# Altium PCB betaV2.1.PcbDoc (part 1 of 2)
Units mm, origin at the board's own origin, x right, y up, seen from the top; angles counter-clockwise.
Board outline 80.01 x 100.08 mm, 2 copper layers (Top Layer, Bottom Layer), stack 1.671 mm thick; 212 components, 112 nets, 564 pads, 132 vias.
Unrouted connection lines stored in the file: 45.
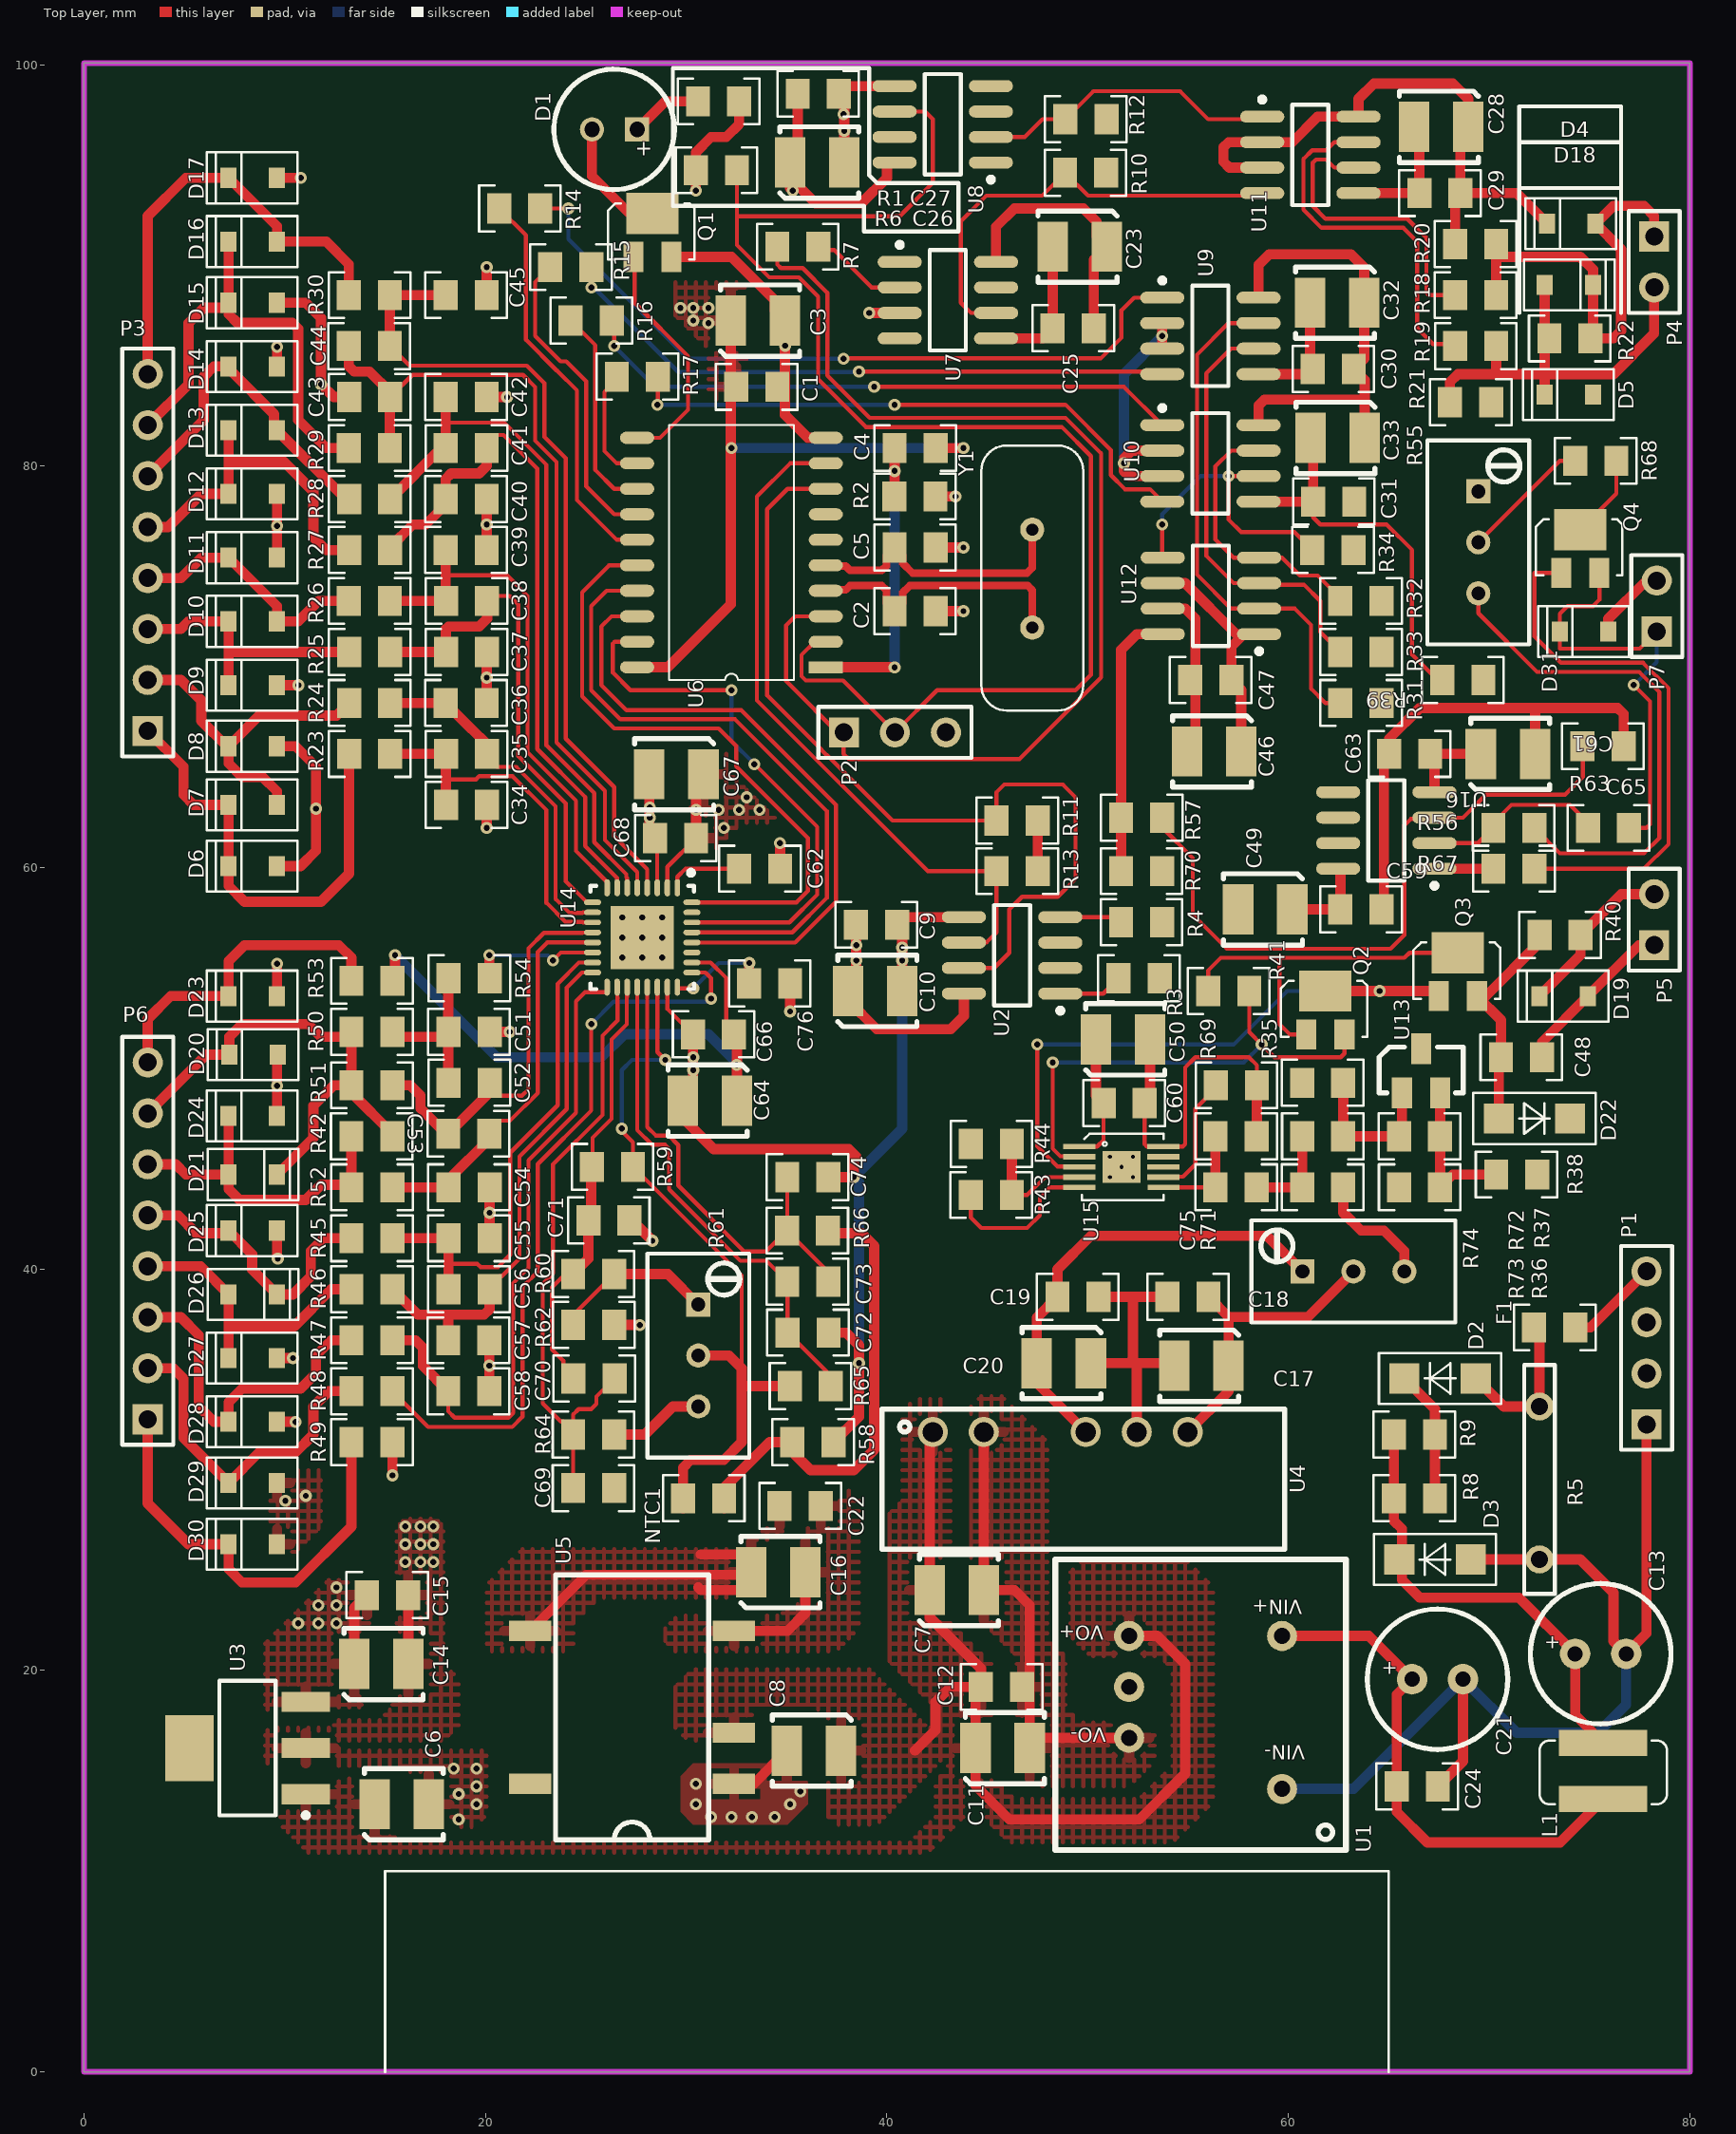
[diagram p0: Top Layer view]
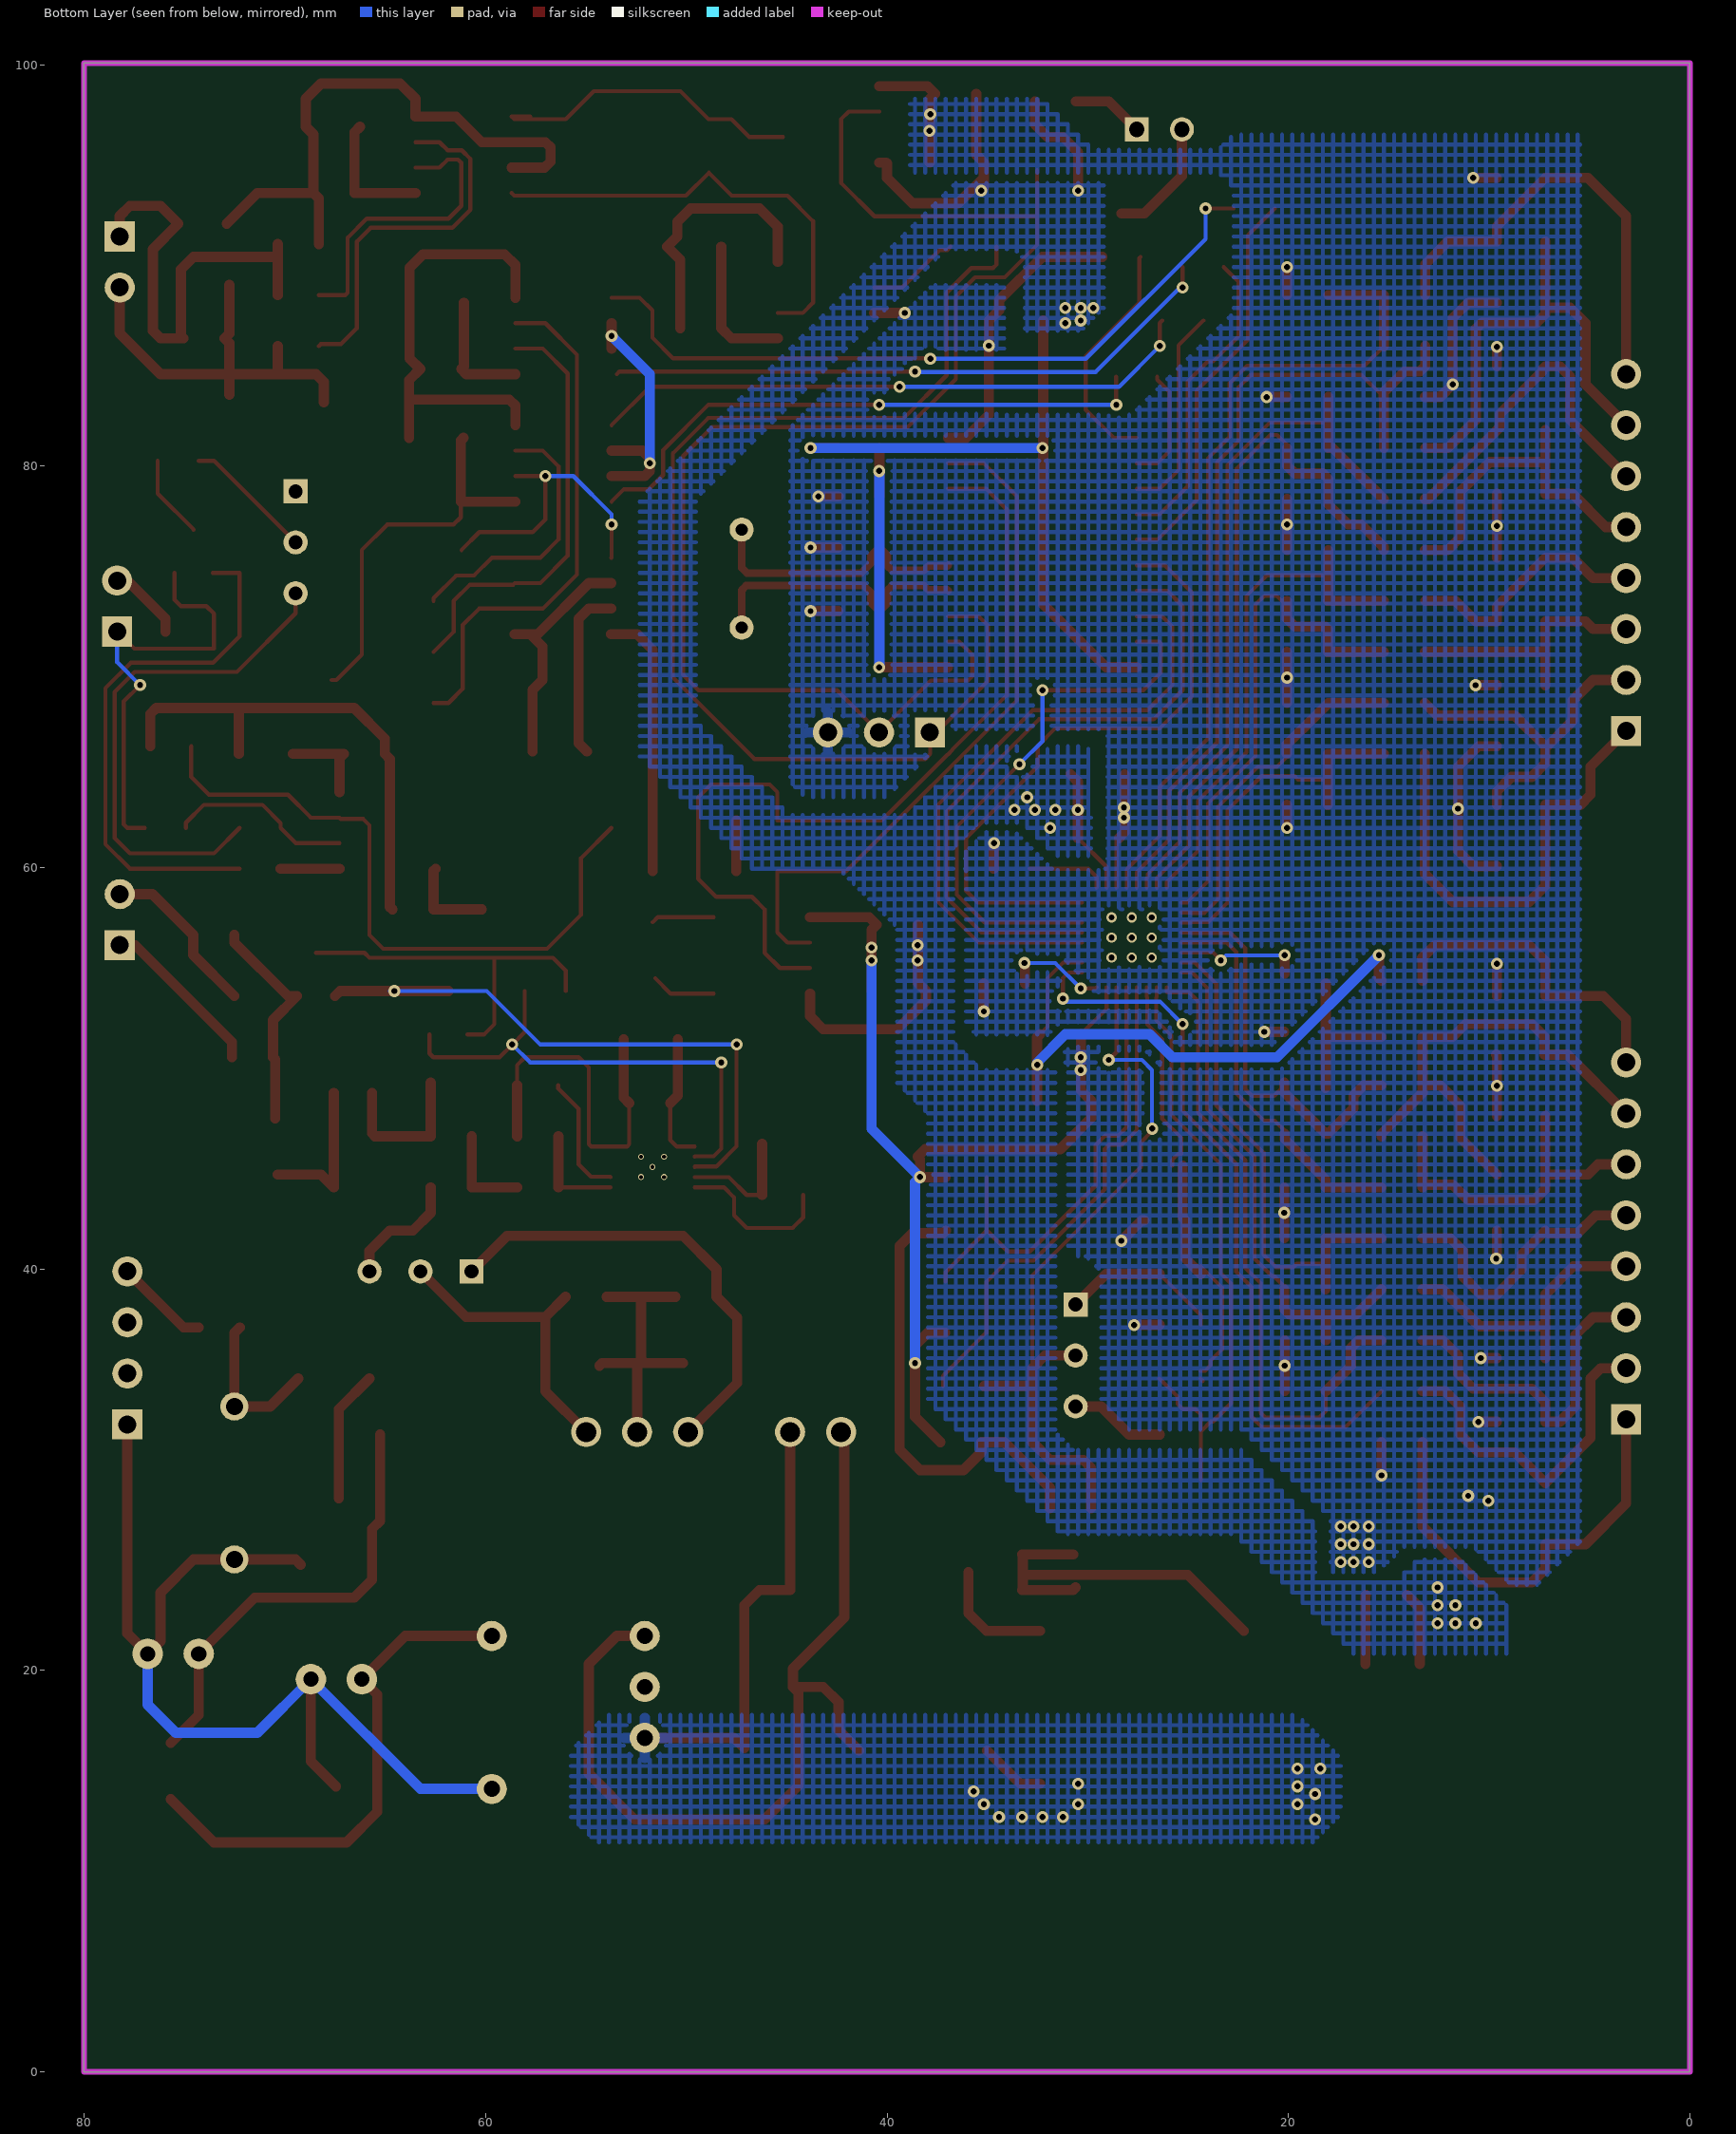
[diagram p1: Bottom Layer view, seen from below]

## Layer stack, top to bottom
Top Solder: solder mask 0.0102, Solder Resist, Dk 3.5
Top Layer: signal copper 0.0356
Dielectric 1: dielectric 1.6, FR-4, Dk 4.8
Bottom Layer: signal copper 0.0356
Bottom Solder: solder mask 0.0102, Solder Resist, Dk 3.5

## Board outline
0,0 0,100.076 80.01,100.076 80.01,0

## Design rules (kind name [scope] priority, off if disabled: settings)
Clearance [All] p1: gap=0.254 ignorepadtopadclearanceinfootprint=FALSE
DiffPairsRouting COM485_DiffPairsRouting [InDifferentialPair ('RS485')] p1: maxlimit=0.254 minlimit=0.254 mostfreqgap=0.254 toplayer_minwidth=0.203 toplayer_maxwidth=0.508 toplayer_prefwidth=0.203 bottomlayer_minwidth=0.203 bottomlayer_maxwidth=0.508 bottomlayer_prefwidth=0.203 maxuncoupledlength=12.7
DiffPairsRouting ADC_DiffPairsRouting [All] p2: maxlimit=0.254 minlimit=0.254 mostfreqgap=0.254 toplayer_minwidth=0.203 toplayer_maxwidth=0.508 toplayer_prefwidth=0.203 bottomlayer_minwidth=0.203 bottomlayer_maxwidth=0.508 bottomlayer_prefwidth=0.203 maxuncoupledlength=12.7
MatchedLengths COM485_MatchedLengths [InDifferentialPair ('RS485')] p1: tolerance=25.4 checknetsindiffpair=FALSE checkdiffpairvsdiffpair=TRUE checkxsignals=TRUE checkothers=TRUE
MatchedLengths ADC_MatchedLengths [InDifferentialPair('CHN2') And InDifferentialPair('CHN2') And InDifferentialPair('CHN3')And InDifferentialPair('CHN4')And InDifferentialPair('CHN5')And InDifferentialPair('CHN6')And InDifferentialPair('CHN7')And InDifferentialPair('REFIN1')] p2: tolerance=25.4 checknetsindiffpair=FALSE checkdiffpairvsdiffpair=TRUE checkxsignals=TRUE checkothers=TRUE
PolygonConnect PolygonConnectVia [IsVia] p1: connectstyle=Direct reliefconductorwidth=0.254 reliefentries=4 polygonreliefangle="90 Angle" airgapwidth=0.254
PolygonConnect [All] p2: connectstyle=Relief reliefconductorwidth=0.508 reliefentries=4 polygonreliefangle="90 Angle" airgapwidth=0.254
RoutingVias [All] p1: holewidth=0.3 width=0.6 viastyle="Through Hole" minholewidth=0.254 minwidth=0.508 maxholewidth=0.711 maxwidth=1.27
ShortCircuit [All] p1: allowed=TRUE
SolderMaskExpansion [All] p1: expansion=0.102 istentingtop=FALSE
Width [All] p1: maxlimit=1.016 minlimit=0.203 preferedwidth=0.203
28 further rules are at their usual default settings.

## Classes and differential pairs
differential pair XTAL: +XTAL_P -XTAL_N
differential pair RS485: +RS485_P -RS485_N
differential pair CHN5: +CHN5_P -CHN5_N
differential pair CHN7: +CHN7_P -CHN7_N
differential pair CHN6: +CHN6_P -CHN6_N
differential pair REFIN1: +REFIN1_P -REFIN1_N
differential pair CHN4: +CHN4_P -CHN4_N
differential pair CHN3: +CHN3_P -CHN3_N
differential pair CHN2: +CHN2_P -CHN2_N
differential pair CHN1: +CHN1_P -CHN1_N

## Components (designator, comment, footprint, x,y, rotation, side; value= is the part's Value field where it differs from the comment)
C1 "CC0805MRX7R9BB104" 0805C 32.496,83.947 r0 top value=0.1uF
C2 "CC0805MRX7R9BB330" 0805C 40.386,72.771 r0 top value=33pF
C3 "T494B106M006AHAUTO" CB 32.225,87.249 r90 top value=10uF
C4 "CC0805MRX7R9BB106" 0805C 42.434,80.899 r180 top value=10uF
C5 "CC0805MRX7R9BB330" 0805C 40.386,75.946 r0 top value=33pF
C6 "T494B106M006AHAUTO" CB 14.478,13.335 r90 top value=10uF
C7 "T494B106M006AHAUTO" CB 42.131,24.003 r90 top value=10uF
C8 "T494B106M006AHAUTO" CB 37.719,16.002 r270 top value=10uF
C9 "CC0805MRX7R9BB104" 0805C 38.465,57.15 r0 top value=0.1uF
C10 "T494B106M006AHAUTO" CB 38.067,53.848 r90 top value=10uF
C11 "T494B107M006AHAUTO" CB 44.417,16.129 r90 top value=100uF
C12 "CC0805MRX7R9BB104" 0805C 46.736,19.177 r180 top value=0.1uF
C13 "ECR1HQG100M-063007" Φ6.3×11.5 74.295,20.828 r0 top value=10uF
C14 "T494B476M010AHAUTO" CB 13.462,20.32 r90 top value=47uF
C15 "CC0805MRX7R9BB104" 0805C 14.097,23.749 r0 top value=0.1uF
C16 "T494B106M006AHAUTO" CB 33.241,24.892 r90 top value=10uF
C17 "T494B476K025ATAUTO" CB 57.023,35.179 r270 top value=47uF
C18 "CC0805MRX7R9BB104" 0805C 56.023,38.608 r180 top value=0.1uF
C19 "CC0805MRX7R9BB104" 0805C 48.498,38.608 r0 top value=0.1uF
C20 "T494B476K025ATAUTO" CB 50.165,35.306 r270 top value=47uF
C21 "ECR1HQG100M-063007" Φ6.3×11.5 66.167,19.558 r0 top value=10uF
C22 "CC0805MRX7R9BB104" 0805C 36.703,28.194 r180 top value=0.1uF
C23 "T494B106M006AHAUTO" CB 50.96,90.932 r270 top value=10uF
C24 "CC0805MRX7R9BB104" 0805C 65.405,14.224 r0 top value=0.1uF
C25 "CC0805MRX7R9BB104" 0805C 50.308,86.868 r180 top value=0.1uF
C26 "T494B106M006AHAUTO" CB 35.179,95.123 r90 top value=10uF
C27 "CC0805MRX7R9BB104" 0805C 35.56,98.552 r0 top value=0.1uF
C28 "T494B106M006AHAUTO" CB 68.961,96.901 r270 top value=10uF
C29 "CC0805MRX7R9BB104" 0805C 68.58,93.599 r180 top value=0.1uF
C30 "CC0805MRX7R9BB104" 0805C 63.262,84.836 r180 top value=0.1uF
C31 "CC0805MRX7R9BB104" 0805C 63.286,78.232 r180 top value=0.1uF
C32 "T494B106M006AHAUTO" CB 63.787,88.138 r270 top value=10uF
C33 "T494B106M006AHAUTO" CB 63.811,81.407 r270 top value=10uF
C34 "CC0805MRX7R9BB103" 0805C 18.034,63.119 r0 top value=0.01uF
C35 "CC0805MRX7R9BB104" 0805C 18.034,65.659 r0 top value=0.1uF
C36 "CC0805MRX7R9BB103" 0805C 18.018,68.199 r0 top value=0.01uF
C37 "CC0805MRX7R9BB103" 0805C 18.034,70.739 r0 top value=0.01uF
C38 "CC0805MRX7R9BB104" 0805C 20.082,73.279 r180 top value=0.1uF
C39 "CC0805MRX7R9BB103" 0805C 18.018,75.819 r0 top value=0.01uF
C40 "CC0805MRX7R9BB103" 0805C 18.018,78.359 r0 top value=0.01uF
C41 "CC0805MRX7R9BB104" 0805C 20.066,80.899 r180 top value=0.1uF
C42 "CC0805MRX7R9BB103" 0805C 18.018,83.439 r0 top value=0.01uF
C43 "CC0805MRX7R9BB103" 0805C 15.256,83.439 r180 top value=0.01uF
C44 "CC0805MRX7R9BB104" 0805C 13.192,85.979 r0 top value=0.1uF
C45 "CC0805MRX7R9BB103" 0805C 18.018,88.519 r0 top value=0.01uF
C46 "T494B106M006AHAUTO" CB 57.658,65.786 r270 top value=10uF
C47 "CC0805MRX7R9BB104" 0805C 55.118,69.342 r0 top value=0.1uF
C48 "CC0805MRX7R9BB103" 0805C 70.596,50.546 r0 top value=0.01uF
C49 "T494B106M025AHAUTO" CB 60.198,57.912 r270 top value=10uF
C50 "T494B106M025AHAUTO" CB 50.419,51.435 r90 top value=10uF
C51 "CC0805MRX7R9BB103" 0805C 18.161,51.816 r0 top value=0.01uF
C52 "CC0805MRX7R9BB104" 0805C 20.209,49.276 r180 top value=0.1uF
C53 "CC0805MRX7R9BB104" 0805C 18.145,46.736 r0 top value=0.1uF
C54 "CC0805MRX7R9BB103" 0805C 18.161,44.069 r0 top value=0.01uF
C55 "CC0805MRX7R9BB103" 0805C 18.161,41.529 r0 top value=0.01uF
C56 "CC0805MRX7R9BB104" 0805C 18.161,38.989 r0 top value=0.1uF
C57 "CC0805MRX7R9BB103" 0805C 18.145,36.449 r0 top value=0.01uF
C58 "CC0805MRX7R9BB103" 0805C 18.145,33.909 r0 top value=0.01uF
C59 "CC0805MRX7R9BB104" 0805C 64.643,57.912 r180 top value=0.1uF
C60 "CC0805MRX7R9BB104" 0805C 52.848,48.26 r180 top value=0.1uF
C61 "T494B106M025AHAUTO" CB 69.596,65.659 r90 top value=10uF
C62 "CC0805MRX7R9BB104" 0805C 34.687,59.944 r180 top value=0.1uF
C63 "CC0805MRX7R9BB104" 0805C 65.024,65.659 r0 top value=0.1uF
C64 "T494B106M006AHAUTO" CB 32.529,48.387 r270 top value=10uF
C65 "CC0805MRX7R9BB104" 0805C 74.66,66.04 r0 top value=0.1uF
C66 "CC0805MRX7R9BB104" 0805C 32.385,51.689 r180 top value=0.1uF
C67 "T494B106M006AHAUTO" CB 30.861,64.643 r270 top value=10uF
C68 "CC0805MRX7R9BB104" 0805C 30.496,61.468 r180 top value=0.1uF
C69 "CC0805MRX7R9BB103" 0805C 24.368,29.083 r0 top value=0.01uF
C70 "CC0805MRX7R9BB104" 0805C 26.432,34.544 r180 top value=0.1uF
C71 "CC0805MRX7R9BB103" 0805C 25.13,42.418 r0 top value=0.01uF
C72 "CC0805MRX7R9BB103" 0805C 35.052,36.83 r0 top value=0.01uF
C73 "CC0805MRX7R9BB104" 0805C 35.036,39.37 r0 top value=0.1uF
C74 "CC0805MRX7R9BB103" 0805C 35.036,44.577 r0 top value=0.01uF
C75 "CC0805MRX7R9BB104" 0805C 58.42,46.609 r180 top value=0.1uF
C76 "CC0805MRX7R9BB104" 0805C 35.179,54.229 r180 top value=0.1uF
D1 "150080GS75000" LEDΦ3.0 27.559,96.774 r180 top
D2 "1N5819HW" SOD123 69.342,34.544 r180 top
D3 "1N5819HW" SOD123 69.088,25.527 r180 top
D4 "SD12CT1" SOD323 75.311,92.075 r180 top
D5 "SD12CT1" SOD323 75.184,83.566 r180 top
D6 "SD03C" SOD323 9.614,60.071 r180 top
D7 "SD03C" SOD323 9.614,63.119 r180 top
D8 "SD03C" SOD323 9.614,66.04 r180 top
D9 "SD03C" SOD323 9.614,69.088 r180 top
D10 "SD03C" SOD323 9.614,72.263 r180 top
D11 "SD03C" SOD323 9.614,75.438 r180 top
D12 "SD03C" SOD323 9.614,78.613 r180 top
D13 "SD03C" SOD323 9.614,81.788 r180 top
D14 "SD03C" SOD323 9.614,84.963 r180 top
D15 "SD03C" SOD323 9.614,88.138 r180 top
D16 "SD03C" SOD323 9.614,91.186 r180 top
D17 "SD03C" SOD323 9.614,94.361 r180 top
D18 "SD12CT1" SOD323 72.771,89.027 r0 top
D19 "SD15CT1" SOD323 74.93,53.594 r180 top
D20 "SD03C" SOD323 9.652,50.673 r180 top
D21 "SD03C" SOD323 7.201,44.704 r0 top
D22 "RB160MM-50TF" SOD123 70.485,47.498 r0 top
D23 "SD03C" sod323 9.614,53.594 r180 top
D24 "SD03C" SOD323 9.614,47.625 r180 top
D25 "SD03C" SOD323 9.614,41.91 r180 top
D26 "SD03C" SOD323 7.201,38.735 r0 top
D27 "SD03C" SOD323 9.614,35.56 r180 top
D28 "SD03C" SOD323 9.614,32.385 r180 top
D29 "SD03C" sod323 9.614,29.337 r180 top
D30 "SD03C" sod323 9.614,26.289 r180 top
D31 "SD15CT1" SOD323 75.946,71.755 r180 top
F1 "Fuse 1" 0805R 74.295,37.084 r180 top
L1 "VLS4012HBX-150M" VLS4012 75.692,16.383 r0 top value=15uH
NTC1 "NTCS0805E3103JHT" 0805R 31.893,28.575 r180 top
P1 "Header 4" HDR1X4 77.851,32.258 r90 top
P2 "Header 3" HDR1X3 37.862,66.735 r0 top
P3 "Header 8" HDR1X8 3.175,66.802 r90 top
P4 "Header 2" HDR1X2 78.232,91.44 r270 top
P5 "Header 2" HDR1X2 78.232,56.134 r90 top
P6 "Header 8" HDR1X8 3.175,32.512 r90 top
P7 "Header 2" HDR1X2 78.359,71.755 r90 top
Q1 "MMSS8050" SOT-23-BJT 27.371,90.424 r0 top
Q2 "SS8550" SOT-23-BJT 60.899,51.689 r0 top
Q3 "SI2309" SOT-23-MOS 67.503,53.594 r0 top
Q4 "MMSS8050" SOT-23-BJT 73.599,74.676 r0 top
R1 "RC0805JR-07120RL" 0805R 32.639,98.171 r180 top value=120
R2 "RC0805JR-0710KL" 0805R 42.418,78.486 r180 top value=10K
R3 "RC0805JR-07470RL" 0805R 51.546,54.483 r0 top value=470
R4 "RC0805JR-073300RL" 0805R 51.673,57.277 r0 top value=3.3K
R5 "10D470K" mov 72.517,29.337 r90 top
R6 "RC0805JR-0710KRL" 0805R 32.528,94.742 r180 top value=10K
R7 "RC0805JR-07470RL" 0805R 34.544,90.932 r0 top value=470
R8 "PNP-200KJBJ26-10R" 0805R 65.262,28.575 r0 top value=10
R9 "PNP-200KJBJ26-10R" 0805R 65.262,31.75 r0 top value=10
R10 "RC0805JR-0710KRL" 0805R 48.879,94.615 r0 top value=10K
R11 "RC0805JR-071KL" 0805R 47.514,62.341 r180 top value=1K
R12 "RC0805JR-07470RL" 0805R 48.895,97.282 r0 top value=470
R13 "RC0805JR-071KL" 0805R 47.514,59.817 r180 top value=1K
R14 "RC0805JR-07470RL" 0805R 22.733,92.837 r180 top value=470
R15 "RC0805JR-07470RL" 0805R 25.273,89.916 r180 top value=470
R16 "RC0805JR-07470RL" 0805R 26.289,87.249 r180 top value=470
R17 "RC0805JR-07470RL" 0805R 28.591,84.455 r180 top value=470
R18 "RC0805JR-0720RL" 0805R 68.31,88.519 r0 top value=20
R19 "RC0805JR-0720RL" 0805R 70.358,85.979 r180 top value=20
R20 "RC0805JR-0710KL" 0805R 68.31,91.059 r0 top value=10K
R21 "RC0805JR-0710KL" 0805R 70.104,83.185 r180 top value=10K
R22 "RC0805JR-07120RL" 0805R 73.009,86.36 r0 top value=120
R23 "RC0805JR-071KL" 0805R 15.256,65.659 r180 top value=1K
R24 "RC0805JR-071KL" 0805R 15.256,68.199 r180 top value=1K
R25 "RC0805JR-071KL" 0805R 15.256,70.739 r180 top value=1K
R26 "RC0805JR-071KL" 0805R 15.24,73.279 r180 top value=1K
R27 "RC0805JR-071KL" 0805R 15.256,75.819 r180 top value=1K
R28 "RC0805JR-071KL" 0805R 15.256,78.359 r180 top value=1K
R29 "RC0805JR-071KL" 0805R 15.24,80.899 r180 top value=1K
R30 "RC0805JR-071KL" 0805R 15.24,88.519 r180 top value=1K
R31 "RC0805JR-071KL" 0805R 64.643,68.199 r180 top value=1K
R32 "RC0805JR-071KL" 0805R 64.643,73.279 r180 top value=1K
R33 "RC0805JR-071KL" 0805R 64.643,70.739 r180 top value=1K
R34 "RC0805JR-071KL" 0805R 63.246,75.819 r180 top value=1K
R35 "RC0805JR-073KL" 0805R 60.69,49.276 r0 top value=3K
R36 "RC0805JR-0710KL" 0805R 67.564,44.069 r180 top value=10K
R37 "RC0805JR-073KL" 0805R 65.516,46.609 r0 top value=3K
R38 "RC0805JR-0710KL" 0805R 70.358,44.704 r0 top value=10K
R39 "RC0805JR-000KL" 0805R 67.675,69.342 r0 top value=0R
R40 "RC0805JR-0715RL" 0805R 74.565,56.642 r180 top value=15
R41 "RC0805JR-0715RL" 0805R 56.007,53.848 r0 top value=15
R42 "RC0805JR-075600RL" 0805R 13.319,46.609 r0 top value=5.6K
R43 "RC0805JR-075600RL" 0805R 44.18,43.688 r0 top value=5.6K
R44 "RC0805JR-078200RL" 0805R 46.228,46.228 r180 top value=8.2K
R45 "RC0805JR-071KL" 0805R 15.367,41.529 r180 top value=1K
R46 "RC0805JR-071KL" 0805R 15.367,38.989 r180 top value=1K
R47 "RC0805JR-071KL" 0805R 15.367,36.449 r180 top value=1K
R48 "RC0805JR-07470RL" 0805R 15.367,33.909 r180 top value=470
R49 "RC0805JR-07470RL" 0805R 15.367,31.369 r180 top value=470
R50 "RC0805JR-071KL" 0805R 15.367,51.816 r180 top value=1K
R51 "RC0805JR-071KL" 0805R 15.367,49.149 r180 top value=1K
R52 "RC0805JR-071KL" 0805R 15.367,44.069 r180 top value=1K
R53 "RC0805JR-07470RL" 0805R 15.367,54.356 r180 top value=470
R54 "RC0805JR-07100RL" 0805R 20.209,54.483 r180 top value=100R
R55 "3296W-1-104" POTENTIOMETER-3296W 69.469,76.2 r270 top value=100K
R56 "RC0805JR-07100ML" 0805R 70.215,61.976 r0 top value=100M
R57 "RC0805JR-072KL" 0805R 53.721,62.484 r180 top value=2K
R58 "RC0805JR-075600RL" 0805R 37.338,31.369 r180 top value=5.6K
R59 "RC0805JR-071000KL" 0805R 27.35,45.087 r180 top value=1M
R60 "RC0805JR-0768KL" 0805R 24.368,39.751 r0 top value=68K
R61 "3296W-1-102" POTENTIOMETER-3296W 30.607,35.687 r270 top value=1K
R62 "RC0805JR-0768KL" 0805R 26.416,37.211 r180 top value=68K
R63 "RC0805JR-072KL" 0805R 76.978,61.976 r180 top value=2K
R64 "RC0805JR-071KL" 0805R 24.368,31.75 r0 top value=1K
R65 "RC0805JR-071KL" 0805R 37.211,34.163 r180 top value=1K
R66 "RC0805JR-071KL" 0805R 35.02,41.91 r0 top value=1K
R67 "RC0805JR-0710KL" 0805R 72.263,59.944 r180 top value=10K
R68 "RC0805JR-07470RL" 0805R 74.295,80.264 r0 top value=470
R69 "RC0805JR-072KL" 0805R 58.436,49.149 r180 top value=2K
R70 "RC0805JR-072KL" 0805R 51.673,59.817 r0 top value=2K
R71 "RC0805JR-073300RL" 0805R 58.42,44.069 r180 top value=3.3K
R72 "RC0805JR-074700RL" 0805R 62.738,46.609 r180 top value=4.7K
R73 "RC0805JR-07100ML" 0805R 60.69,44.069 r0 top value=100M
R74 "3296W-1-104" POTENTIOMETER-3296W 63.246,39.878 r0 top value=100K
U1 "WRB_ST(SD)-3WR2" WRB_ST(SD)-3WR2 59.69,14.097 r180 top
U2 "VO2630" so-8-n 48.654,53.721 r180 top
U3 "LM1117IMP-3.3/NOPB" SOT223_N 8.149,16.129 r180 top
U4 "A05_S-1WR3" A05_S-1WR3 42.291,31.877 r0 top
U5 "F0505XT-W2R3" F0505XT-W2R3 32.385,14.351 r90 top
U6 "STC12C5620AD" SOP20 36.957,69.977 r180 top
U7 "6N137" so-8-n 40.627,90.17 r0 top
U8 "6N137" so-8-n 45.199,95.123 r180 top
U9 "VO2630" so-8-n 53.708,88.392 r0 top
U10 "VO2630" so-8-n 53.708,82.042 r0 top
U11 "SN65LBC184" so-8-n 58.687,97.409 r0 top
U12 "DAC7611U" so-8-n 58.56,71.628 r180 top
U13 "TL431" SOT-23-3 65.664,48.768 r0 top
U14 "AD7124-8" TI-RHB32-3150X3150TP_V 27.813,56.515 r270 top
U15 "XTR111" S-PDSO-G10 49.589,46.101 r0 top
U16 "TL062ACD" so-8-n 67.297,59.944 r180 top
Y1 "XTAL" 11.0592MHZ 47.244,76.835 r270 top

## Footprints (in the part's own frame and the unit in brackets; to place one, negate y for a bottom-side part, rotate by r counter-clockwise, add the part's x,y. Pads: shape width x height; smd on the part's side, far side on the other; paste and mask are expansions set on the pad)
11.0592MHZ [mm]
  round 1.2 hole 0.6: 1(0,0) 2(4.88,0)
  silkscreen extent -4.19,-2.54 9.02,2.54, body extent -3.99,-2.29 8.81,2.54, height 4.3
0805C [mm]
  rect 1.2x1.5 smd: 1(0,0) 2(2.048,0)
  silkscreen extent -1.02,-1.14 3.05,1.14, body extent 0.02,-0.65 2.02,0.66, height 0.73
0805R [mm]
  rect 1.2x1.5 smd: 1(0,0) 2(2.048,0)
  silkscreen extent -1.02,-1.14 3.05,1.14, body extent -0.13,-0.67 2.17,0.68, height 0.76
A05_S-1WR3 [mm]
  round 1.5 hole 1: 1(0,0) 2(2.54,0) 4(7.62,0) 5(10.16,0) 6(12.7,0)
  silkscreen extent -2.54,-5.84 17.53,1.14, body extent -2.33,-5.29 17.32,0.71, height 10.16
CB [mm] "Tantalum?Capacitor"
  rect 2.5x1.524 smd: 1(0,0) 2(0,-2.7)
  silkscreen extent -1.78,-3.43 1.78,0.51, body extent -1.48,-3.37 1.52,0.33, height 4.11
F0505XT-W2R3 [mm]
  rect 1x2.1 smd: 1(0,0) 2(2.54,0) 4(7.62,0) 5(7.62,10.16) 8(0,10.16)
  silkscreen extent -2.79,1.27 10.41,8.89, body extent -2.79,-0.61 10.41,10.79, height 5
HDR1X2 [mm] "Connector; Header; 2 Position"
  rect 1.5x1.5 hole 0.9: 1(0,0)
  round 1.5 hole 0.9: 2(2.54,0)
  silkscreen extent -1.27,-1.27 3.81,1.27
HDR1X3 [mm] "Connector; Header; 3 Position"
  rect 1.5x1.5 hole 0.9: 1(0,0)
  round 1.5 hole 0.9: 2(2.54,0) 3(5.08,0)
  silkscreen extent -1.27,-1.27 6.35,1.27
HDR1X4 [mm] "Connector; Header; 4 Position"
  rect 1.5x1.5 hole 0.9: 1(0,0)
  round 1.5 hole 0.9: 2(2.54,0) 3(5.08,0) 4(7.62,0)
  silkscreen extent -1.27,-1.27 8.89,1.27
HDR1X8 [mm] "Connector; Header; 8 Position"
  rect 1.5x1.5 hole 0.9: 1(0,0)
  round 1.5 hole 0.9: 2(2.54,0) 3(5.08,0) 4(7.62,0) 5(10.16,0) 6(12.7,0) 7(15.24,0) 8(17.78,0)
  silkscreen extent -1.27,-1.27 19.05,1.27
LEDΦ3.0 [mm]
  rect 1.2x1.2 hole 0.762: 1(0,0)
  round 1.2 hole 0.762: 2(2.25,0)
  silkscreen extent -1.86,-3 4.14,3, body extent -0.64,-1.9 2.79,1.9, height 4.64
mov [mm] "Axial Device, Thru-Hole; 2 Leads; 0.3 in Pin Spacing"
  round 1.4 hole 0.85: 1(-3.81,0) 2(3.81,0)
  silkscreen extent -5.53,-0.76 5.88,0.76, body extent -5.5,-0.9 5.8,0.95, height 18.5
POTENTIOMETER-3296W [mm] "Thru-Hole; 3 Leads"
  rect 1.2x1.2 hole 0.7: 1(-2.54,0)
  round 1.2 hole 0.7: 2(0,0) 3(2.54,0)
  silkscreen extent -5.08,-2.54 5.08,2.54, body extent -4.78,-2.41 4.78,2.41, height 11.8
S-PDSO-G10 [mm]
  rect 1.6x0.27 smd: 1(0,0) 2(0,-0.508) 3(0,-1.016) 4(0,-1.524) 5(0,-2.032) 6(4.2,-2.032) 7(4.191,-1.524) 8(4.191,-1.016) 9(4.191,-0.508) 10(4.191,0)
  rect 1.88x1.57 smd: 12(2.1,-1.016)
  silkscreen extent 0.13,-2.67 4.19,0.64, body extent -0.42,-2.56 4.62,0.54, height 1.1
so-8-n [mm]
  oval 2.2x0.6 smd: 1(0.013,0) 2(0.013,-1.27) 3(0.013,-2.54) 4(0.013,-3.81) 5(4.813,-3.81) 6(4.813,-2.54) 7(4.813,-1.27) 8(4.813,0)
  silkscreen extent -0.11,-4.41 3.31,0.97, body extent -0.48,-4.39 5.3,0.51, height 1.45
SOD123 [mm]
  rect 1.5x1.5 smd: 1(0,0) 2(3.556,0)
  silkscreen extent -1.27,-1.27 4.83,1.27, body extent -0.2,-0.8 3.5,0.8, height 1.27
SOD323 [mm]
  rect 0.8x1 smd: 1(0,0) 2(2.413,0)
  silkscreen extent -1.03,-1.27 3.49,1.27, body extent -0.16,-0.68 2.44,0.67, height 1.1
sod323 [mm]
  rect 0.8x1 smd: 1(0,0) 2(2.413,0)
  silkscreen extent -1.03,-1.27 3.49,1.27, body extent -0.16,-0.68 2.44,0.67, height 1.1
SOP20 [mm]
  rect 1.7x0.6 smd: 1(0,0)
  oval 1.7x0.6 smd: 2(0,-1.27) 3(0,-2.54) 4(0,-3.81) 5(0,-5.08) 6(0,-6.35) 7(0,-7.62) 8(0,-8.89) 9(0,-10.16) 10(0,-11.43) 11(9.4,-11.43) 12(9.4,-10.16) 13(9.4,-8.89) 14(9.4,-7.62) 15(9.4,-6.35) 16(9.4,-5.08) 17(9.4,-3.81) 18(9.4,-2.54) 19(9.4,-1.27) 20(9.4,0)
  silkscreen extent 1.58,-12.06 7.82,0.64, body extent -0.45,-12.07 9.85,0.63, height 2.51
SOT223_N [mm] "SOT223, 4-Leads, Body 6.5x3.5mm, Pitch 2.3mm, Lead Span 7mm, IPC Medium Density"
  rect 2.4x1 smd: 1(-2.9,2.3) 2(-2.9,0) 3(-2.9,-2.3)
  rect 2.4x3.3 smd: 4(2.9,0)
  silkscreen extent -3.03,-3.35 1.4,3.47, body extent -1.85,-3.35 1.85,3.35, height 1.7
SOT-23-3 [mm]
  rect 1x1.524 smd: 1(0,0) 2(1.9,0) 3(0.95,2.2)
  silkscreen extent -1.14,0 3.05,2.29, body extent -0.55,-0.23 2.45,2.27, height 0.55
SOT-23-BJT [mm]
  rect 2.6x2.05 smd: 1(0.95,2.159)
  rect 1x1.5 smd: 2(0,0) 3(1.9,0)
  silkscreen extent -1.27,-0.13 3.05,2.67, body extent -0.55,-0.23 2.45,2.27, height 0.55
SOT-23-MOS [mm]
  rect 1x1.5 smd: 1(0,0) 3(1.9,0)
  rect 2.6x2.05 smd: 2(0.95,2.159)
  silkscreen extent -1.27,-0.13 3.05,2.67, body extent -0.55,-0.11 2.45,2.39, height 0.55
TI-RHB32-3150X3150TP_V [mm] "QFN, 32-Leads, Body 5x5mm, Pitch 0.5mm, Thermal Pad 3.15x3.15mm"
  oval 0.85x0.28 smd: 1(-2.475,1.75) 2(-2.475,1.25) 3(-2.475,0.75) 4(-2.475,0.25) 5(-2.475,-0.25) 6(-2.475,-0.75) 7(-2.475,-1.25) 8(-2.475,-1.75) 17(2.475,-1.75) 18(2.475,-1.25) 19(2.475,-0.75) 20(2.475,-0.25) 21(2.475,0.25) 22(2.475,0.75) 23(2.475,1.25) 24(2.475,1.75)
  oval 0.28x0.85 smd: 9(-1.75,-2.475) 10(-1.25,-2.475) 11(-0.75,-2.475) 12(-0.25,-2.475) 13(0.25,-2.475) 14(0.75,-2.475) 15(1.25,-2.475) 16(1.75,-2.475) 25(1.75,2.475) 26(1.25,2.475) 27(0.75,2.475) 28(0.25,2.475) 29(-0.25,2.475) 30(-0.75,2.475) 31(-1.25,2.475) 32(-1.75,2.475)
  rect 3.15x3.15 smd: 33(0,0)
  silkscreen extent -3.35,-2.58 2.58,2.57, body extent -2.54,-2.5 2.46,2.5, height 0.85
VLS4012 [mm]
  rect 4.4x1.3 smd: 1(0,0) 2(0,-2.8)
  silkscreen extent -3.17,-3.05 3.17,0.13, body extent -2.03,-3.62 2.03,0.83, height 1.7
WRB_ST(SD)-3WR2 [mm] "WRB_ST(SD)-3WR2"
  round 1.5 hole 0.8: 1(0,0) 4(0,-7.62) 5(7.62,-7.62) 6(7.62,-5.08) 7(7.62,-2.54)
  silkscreen extent -3.18,-11.43 11.3,3.05, body extent -2.94,-11.19 11.06,2.81, height 9
Φ6.3×11.5 [mil]
  round 60 hole 30: 1(0,0) 2(100,0)
  silkscreen extent -88,-138 188,138, body extent -75,-125 175,125, height 454

## Part data
C1 C2 C4 C5 C9 C12 C15 C18 C19 C22 C24 C25 C27 C29 C30 C31 C34 C35 C36 C37 C38 C39 C40 C41 C42 C43 C44 C45 C47 C48 C51 C52 C53 C54 C55 C56 C57 C58 C59 C60 C62 C63 C65 C66 C68 C69 C70 C71 C72 C73 C74 C75 C76: library part Cap, "Capacitor"
  C2 C5 C9 C12 C15 C18 C19 C22 C24 C25 C27 C29 C30 C31 C34 C35 C36 C37 C38 C39 C40 C41 C42 C43 C44 C45 C47 C48 C51 C52 C53 C54 C55 C56 C57 C58 C59 C60 C62 C63 C65 C66 C68 C69 C70 C71 C72 C73 C74 C75 C76: LatestRevisionDate=17-Jul-2002, LatestRevisionNote="Re-released for DXP Platform.", PackageDescription="Radial Cap, Thru-Hole; 2 Leads; 0.3 in Pin Spacing", PackageReference=RAD-0.3, Published=8-Jun-2000, Publisher="Altium Limited"
C3 C6 C7 C8 C10 C11 C13 C14 C16 C17 C20 C21 C23 C26 C28 C32 C33 C46 C49 C50 C61 C64 C67: library part "Cap Pol1", "Polarized Capacitor (Radial)", LatestRevisionDate=17-Jul-2002, LatestRevisionNote="Re-released for DXP Platform.", PackageDescription="Polarized Capacitor (Radial); 2 Leads", PackageReference=RB7.6-15, Published=8-Jun-2000, Publisher="Altium Limited"
D1: library part LED2, "Typical RED, GREEN, YELLOW, AMBER GaAs LED", LatestRevisionDate=17-Jul-2002, LatestRevisionNote="Re-released for DXP Platform.", PackageDescription="SM LED; 2 Flat Leads", PackageReference=3.2X1.6X1.1, PackageVersion=Feb-2002, Published=8-Jun-2000, Publisher="Altium Limited"
D2 D3: library part Diode, "Default Diode", Code_JEDEC=DO-214-AB, LatestRevisionDate=17-Jul-2002, LatestRevisionNote="Re-released for DXP Platform.", PackageDescription="DO-214-AB/SMC; 2 C-Bend Leads; Body 7.9 x 5.9 mm, inc. leads (LxW)", PackageReference=SMC, PackageVersion=Sep-1996, Published=8-Jun-2000, Publisher="Altium Limited"
D4 D5 D18 D19 D31: library part "D Zener", "Zener Diode", LatestRevisionDate=17-Jul-2002, LatestRevisionNote="Re-released for DXP Platform.", PackageDescription="Diode, Thru-Hole; 2 Leads; 0.7 in Pin Spacing", PackageReference=DIODE-0.7, Published=8-Jun-2000, Publisher="Altium Limited"
D6 D7 D8 D9 D10 D11 D12 D13 D14 D15 D16 D17 D20 D21 D23 D24 D25 D26 D27 D28 D29 D30: library part "TVS DIODE"
D22: library part "D Schottky", "Schottky Diode", Code_JEDEC=DO-214-AA, LatestRevisionDate=17-Jul-2002, LatestRevisionNote="Re-released for DXP Platform.", PackageDescription="DO-214-AA/SMB; 2 C-Bend Leads; Body 5.3 x 3.6 mm, inc. leads (LxW)", PackageReference=SMB, Published=8-Jun-2000, Publisher="Altium Limited"
F1: "Fuse", LatestRevisionDate=17-Jul-2002, LatestRevisionNote="Re-released for DXP Platform.", PackageDescription="Thru-Hole; 2 Leads", PackageReference=PIN-W2/E2.8, Published=8-Jun-2000, Publisher="Altium Limited"
L1: library part Inductor
NTC1 R5: library part "Res Varistor", "Varistor (Voltage-Sensitive Resistor)", Code_IPC=RESC2012, LatestRevisionDate=29-May-2009, LatestRevisionNote="IPC-7351 Footprint Added.", PackageDescription="Chip Resistor 0805 Case Size", PackageReference=6-0805, PackageVersion=Mar-2003, Published=24-Mar-1999, Publisher="Altium Limited"
P1: "Header, 4-Pin", LatestRevisionDate=17-Jul-2002, LatestRevisionNote="Re-released for DXP Platform.", Publisher="Altium Limited"
P2: "Header, 3-Pin", LatestRevisionDate=17-Jul-2002, LatestRevisionNote="Re-released for DXP Platform.", Publisher="Altium Limited"
P3 P6: "Header, 8-Pin", LatestRevisionDate=17-Jul-2002, LatestRevisionNote="Re-released for DXP Platform.", Publisher="Altium Limited"
P4 P5 P7: "Header, 2-Pin", LatestRevisionDate=17-Jul-2002, LatestRevisionNote="Re-released for DXP Platform.", Publisher="Altium Limited"
Q1 Q4: library part NPN, "NPN Bipolar Transistor", Code_JEDEC=TO-226-AA, LatestRevisionDate=17-Jul-2002, LatestRevisionNote="Re-released for DXP Platform.", PackageDescription="TO, Flat Index; 3 In-Line, Axial Leads; Body Dia. 4.8mm; Leads 0.55 x 0.51 mm (max)", PackageReference=TO-226-AA, Published=8-Jun-2000, Publisher="Altium Limited"
Q2: library part PNP, "PNP Bipolar Transistor", LatestRevisionDate=29-May-2009, LatestRevisionNote="IPC-7351 Footprint Added.", PackageDescription="3-Pin SOT-23 Package 0.95 mm Pitch, 2.4 mm Lead Span", PackageReference=SOT-23B, PackageVersion=Aug-1999, Published=8-Jun-2000, Publisher="Altium Limited"
Q3: library part NMOS-2, "N-Channel Power MOSFET", ComponentLink1Description="Manufacturer Link", ComponentLink1URL=http://www.irf.com/, DatasheetVersion=PD-9.814, LatestRevisionDate=17-Jul-2002, LatestRevisionNote="Re-released for DXP Platform.", Note="Pin 2 is electrically connected to pin 4.", PackageDescription="TO, Thru-Hole, Vertical, Heatsink Mounted; 3 In-Line Leads; Pitch 2.54 mm", PackageReference=TO-220AB, PackageVersion=Feb-1997, Published=8-Jun-2000, Publisher="Altium Limited"
R1 R2 R3 R4 R6 R7 R8 R9 R10 R11 R12 R13 R14 R15 R16 R17 R18 R19 R20 R21 R22 R23 R24 R25 R26 R27 R28 R29 R30 R31 R32 R33 R34 R35 R36 R37 R38 R39 R40 R41 R42 R43 R44 R45 R46 R47 R48 R49 R50 R51 R52 R53 R54 R56 R57 R58 R59 R60 R62 R63 R64 R65 R66 R67 R68 R69 R70 R71 R72 R73: library part Res2, "Resistor", LatestRevisionDate=17-Jul-2002, LatestRevisionNote="Re-released for DXP Platform.", PackageDescription="Axial Device, Thru-Hole; 2 Leads; 0.4 in Pin Spacing", PackageReference=AXIAL-0.4, Published=8-Jun-2000, Publisher="Altium Limited"
R55 R61 R74: library part RPot, "Potentiometer", LatestRevisionDate=17-Jul-2002, LatestRevisionNote="Re-released for DXP Platform.", PackageDescription="Variable Resistor, Thru-Hole; 3 Leads", PackageReference=VR5, Published=8-Jun-2000, Publisher="Altium Limited", Set Position=0.5, Sim Note="Enter the Resistance value and the set point into parameter fields."
U3: library part LM1117IMP
U11: library part SNx5LBC184
U12: library part DAC7611
U16: "Low-Power JFET-Input Operational Amplifier, 7 to 36 V, 0 to 70 degC, 8-pin SOIC (D8), Green (RoHS & no Sb/Br)", Manufacturer="Texas Instruments", Rating=Catalog, Supplier Part Number 1=296-7175-5-ND, Total Supply Voltage(Max)(+5V is 5, +/-5V is 10)=36, Total Supply Voltage(Min)(+5V is 5, +/-5V is 10)=7, CMRR(Min)(dB)=80, Code_JEDEC=MS-012, ComponentLink1Description="Manufacturer URL", ComponentLink1URL=http://www.ti.com/, ComponentLink2Description=Datasheet, ComponentLink2URL=http://www.ti.com/lit/ds/symlink/tl062a.pdf, ComponentLink3Description="Package Specification", ComponentLink3URL=http://www.ti.com/litv/pdf/msoi002j, DatasheetVersion=SLOS078J, Eco-Plan="Green (RoHS & no Sb/Br)", GBW(Typ)(MHz)=1, IIB(Max)(pA)=200, Iq per channel(Max)(mA)=0.25, Mounting Technology="Surface Mount", Number of Channels=2, Offset Drift(Typ)(uV/C)=10, PackageDescription="8-Pin Plastic Small Outline, Body 4.9 x 3.9 mm, Pitch 1.27 mm", PackageReference=D8, PackageVersion="4040047-3/M, 06/2011", PartNumber=TL062ACD, Slew Rate(Typ)(V/us)=3.5, Sub Family="General Purpose Amplifier, High Supply Voltage Amplifier (>=30V), Low Power Amp (<=500uA)", Supplier 1=Digi-Key, Supplier 2=Farnell, Supplier 3=Newark, Supplier 4=Mouser, Supplier Part Number 2=9593241, Supplier Part Number 3=08F9224, Supplier Part Number 4=595-TL062ACD, Vio (25C)(Max)(mV)=6, Vn at 1kHz(Typ)(nV/rtHz)=42
Y1: "Crystal Oscillator", LatestRevisionDate=17-Jul-2002, LatestRevisionNote="Re-released for DXP Platform.", PackageDescription="Crystal, Thru-Hole; 2 Leads; Body 3.1 x 8.2 mm (Dia.xH)", PackageReference=R38, Published=8-Jun-2000, Publisher="Altium Limited"

## Via types
v1: diameter 0.6, hole 0.3, Top Layer to Bottom Layer, 118 vias
v2: diameter 0.5, hole 0.3, Top Layer to Bottom Layer, 9 vias
v3: diameter 0.3, hole 0.2, Top Layer to Bottom Layer, 5 vias

## Nets (pads, with @x,y where several pads share a name; then routed paths per layer and width w, separated by ;. In a path a pad name is that pad's centre, name@x,y a point inside that pad or via, vN(x,y) a via of type N, cw(c..) or ccw(c..) an arc to the next point about the centre after c; other vN are vias at no path point)
3.3VCC: C1.1 C3.1 C4.1 C9.1 C10.1 C14.1 C15.1 C26.1 C27.1 C64.1 C66.1 C67.1 C68.1 R1.1 R6.2 R11.1 R13.1 R53.1 U2.8 U3.3 U6.20 U8.8 U14.2 U14.26 | length 105.1
  Top Layer w0.203: U14.2@29.063,58.99 29.063,60.035 C68.1@30.496,61.468 ; U14.26@30.288,55.265 31.222,55.265 32.004,54.483 32.004,52.07 C66.1@32.385,51.689
  Top Layer w0.508: C14.1@13.462,20.32 13.462,23.114 C15.1@14.097,23.749 ; R53.1@15.367,54.356 15.494,54.483 v1(15.494,55.626) ; U6.20@27.557,69.977 29.083,69.977 32.225,73.119 C3.1@32.225,87.249 ; v1(30.48,93.726) R6.2@30.48,94.742 30.48,95.631 31.242,96.393 32.004,96.393 32.639,97.028 R1.1@32.639,98.171 ; C68.1@30.496,61.468 30.496,64.278 C67.1@30.861,64.643 ; C66.1@32.385,51.689 32.529,51.545 C64.1@32.529,48.387 ; v1(35.306,93.726) 35.179,93.853 C26.1@35.179,94.361 ; C27.1@35.56,98.552 35.56,95.504 C26.1@35.179,95.123 C26.1@35.179,94.361 ; C9.1@38.465,57.15 38.465,54.246 C10.1@38.067,53.848 38.067,53.373 39.497,51.943 43.18,51.943 43.841,52.604 U2.8@43.841,53.721 ; U8.8@40.386,95.123 40.045,95.123 40.003,95.081 40.003,94.359 38.735,93.091 36.449,93.091 C26.1@35.179,94.361 ; C4.1@42.434,80.899 v1(43.815,80.899) ; R13.1@47.514,59.817 R11.1@47.514,62.341
  Bottom Layer w0.508: v1(15.494,55.626) 20.574,50.546 25.781,50.546 26.924,51.689 31.115,51.689 32.512,50.292 v1(32.512,50.165) ; v1(32.258,80.899) v1(43.815,80.899)
  other v1: 10.668,22.352 11.684,22.352 12.573,22.352 11.684,23.241 12.573,23.241 12.573,24.13 38.481,55.372 38.481,56.134 31.877,61.976 30.496,62.873 31.623,62.865 32.639,62.865 33.655,62.865 33.02,63.5 31.115,87.122 30.353,87.249 29.718,87.884 30.353,87.884 31.115,87.884
5VDD: C16.1 C22.2 C23.1 C25.1 C28.1 C29.1 C30.1 C31.1 C32.1 C33.1 D4.2 R3.2 R10.2 R12.2 R20.1 R31.1 R32.1 R33.1 R34.1 U5.5 U7.8 U9.8 U10.8 U11.2 U11.3 U11.8 | length 84.8
  Top Layer w0.508: U5.5@22.225,21.971 25.019,24.765 33.114,24.765 C16.1@33.241,24.892 ; 30.607,24.13 30.734,24.003 33.274,24.003 33.241,24.036 C16.1@33.241,24.892 ; 30.734,25.781 33.274,25.781 33.241,25.748 C16.1@33.241,24.892 ; U7.8@45.44,90.17 45.44,91.922 46.355,92.837 49.784,92.837 50.452,92.169 50.452,91.44 C23.1@50.96,90.932 50.308,90.28 C25.1@50.308,86.868 ; U10.8@58.521,82.042 58.521,83.014 58.819,83.312 63.811,83.312 ; U9.8@58.521,88.392 58.521,90.017 59.055,90.551 63.119,90.551 63.787,89.883 C32.1@63.787,88.138 63.787,85.361 C30.1@63.262,84.836 63.811,84.287 63.811,83.312 ; U11.3@58.7,94.869 57.067,94.869 56.769,95.167 56.769,95.885 57.023,96.139 U11.2@58.7,96.139 60.198,96.139 61.468,97.409 U11.8@63.5,97.409 63.5,98.298 64.262,99.06 68.199,99.06 68.961,98.298 C28.1@68.961,96.901 68.58,96.52 C29.1@68.58,93.599 ; C33.1@63.811,81.407 63.811,83.312 ; R20.1@68.31,91.059 68.31,93.329 C29.1@68.58,93.599 ; D4.2@72.898,92.075 71.374,93.599 C29.1@68.58,93.599
5VIN: C6.1 C7.1 C8.1 C11.1 C12.2 U1.5 U3.1 U4.1 U5.2 | length 45.2
  Top Layer w0.508: 41.402,16.002 42.418,17.018 42.418,18.415 43.18,19.177 C12.2@44.688,19.177 ; U4.1@42.291,31.877 42.131,31.717 C7.1@42.131,24.003 42.131,22.639 44.688,20.082 C12.2@44.688,19.177 ; U1.5@52.07,21.717 53.467,21.717 54.864,20.32 54.864,14.859 52.578,12.573 46.101,12.573 44.417,14.257 C11.1@44.417,16.129 44.417,18.906 C12.2@44.688,19.177
5VIN-: C1.2 C2.2 C3.2 C5.2 C6.2 C7.2 C8.2 C9.2 C10.2 C11.2 C12.1 C14.2 C15.2 C26.2 C27.2 C34.2 C36.2 C37.2 C39.2 C40.2 C42.2 C43.2 C45.2 C51.2 C54.2 C55.2 C57.2 C58.2 C62.1 C64.2 C66.2 C67.2 C68.2 C69.2 C71.2 C72.2 C74.2 C76.1 D6.1 D8.1 D9.1 D11.1 D12.1 D14.1 D15.1 D17.1 D20.1 D23.1 D24.1 D25.1 D27.1 D28.1 D29.1 D30.1 P2.3 Q1.3 R2.1 R49.1 R58.1 R62.1 U1.7 U2.5 U3.2 U4.2 U5.1 U6.10 U7.3 U8.5 U9.2 U9.3 U10.2 U10.3 U14.3 U14.23 | length 181.3
  Top Layer w0.203: C68.2@28.448,61.468 28.559,61.357 28.559,58.994 U14.3@28.563,58.99 ; 29.063,52.951 U14.23@29.063,54.04 ; 29.075,52.951 C66.2@30.337,51.689
  Top Layer w0.508: D28.1@9.614,32.385 v1(10.541,32.385) ; D27.1@9.614,35.56 v1(10.414,35.56) ; D25.1@9.614,41.91 9.614,40.551 v1(9.652,40.513) ; D24.1@9.614,47.625 v1(9.614,49.13) 9.614,50.635 D20.1@9.652,50.673 ; D23.1@9.614,53.594 v1(9.614,55.207) ; D6.1@9.614,60.071 10.795,60.071 11.557,60.833 v1(11.557,62.928) 11.557,65.024 10.541,66.04 D8.1@9.614,66.04 ; D9.1@9.614,69.088 10.668,69.088 v1(10.676,69.08) ; D11.1@9.614,75.438 v1(9.614,77.025) D12.1@9.614,78.613 ; D14.1@9.614,84.963 v1(9.614,85.933) ; D15.1@9.614,88.138 11.049,88.138 11.811,87.376 v1(11.811,84.074) 12.446,83.439 C43.2@13.208,83.439 ; D17.1@9.614,94.361 v1(10.795,94.361) ; v1(15.367,29.718) R49.1@15.367,31.369 ; C15.2@16.145,23.749 16.162,23.732 C14.2@16.162,20.32 ; v1(20.066,61.976) 20.066,63.103 C34.2@20.082,63.119 ; C36.2@20.066,68.199 v1(20.066,69.461) 20.066,70.723 C37.2@20.082,70.739 ; C39.2@20.066,75.819 v1(20.066,77.089) C40.2@20.066,78.359 ; C42.2@20.066,83.439 v1(21.082,83.439) ; C45.2@20.066,88.519 v1(20.066,89.916) ; C58.2@20.193,33.909 v1(20.193,35.179) C57.2@20.193,36.449 ; C55.2@20.209,41.529 v1(20.209,42.799) C54.2@20.209,44.069 ; C51.2@20.209,51.816 v1(21.209,51.816) ; R62.1@26.416,37.211 v1(27.686,37.211) ; C71.2@27.178,42.418 27.305,42.418 v1(28.321,41.402) ; C67.2@28.161,64.643 28.161,61.755 C68.2@28.448,61.468 ; Q1.3@29.271,90.424 32.258,90.424 34.417,88.265 34.417,87.757 C3.2@34.925,87.249 v1(34.925,86) 34.925,82.55 36.068,81.407 U6.10@36.957,81.407 ; C66.2@30.337,51.689 30.337,48.895 C64.2@29.829,48.387 29.829,47.514 31.369,45.974 38.1,45.974 38.481,45.593 38.354,45.466 v1(38.354,44.577) C74.2@37.084,44.577 ; U5.1@32.385,14.351 33.368,14.351 C8.2@35.019,16.002 ; v1(34.671,61.214) 34.679,61.206 34.679,59.952 C62.1@34.687,59.944 ; v1(35.179,52.832) C76.1@35.179,54.229 ; C72.2@37.1,36.83 37.973,36.83 38.608,36.195 v1(38.608,35.306) 38.608,32.639 R58.1@37.338,31.369 ; C26.2@37.879,95.123 v1(37.879,96.702) 37.879,98.281 C27.2@37.608,98.552 37.989,98.933 U8.5@40.386,98.933 ; v1(39.116,87.63) U7.3@40.64,87.63 ; C10.2@40.767,53.848 v1(40.767,55.372) v1(40.767,56.007) 40.767,56.896 C9.2@40.513,57.15 40.894,57.531 U2.5@43.841,57.531 ; R2.1@42.418,78.486 v1(43.418,78.486) ; C2.2@42.434,72.771 v1(43.815,72.771) ; C5.2@42.434,75.946 v1(43.815,75.946) ; U4.2@44.831,31.877 C7.2@44.831,24.003 46.355,24.003 47.117,23.241 C11.2@47.117,16.129 47.625,16.637 U1.7@52.07,16.637 ; U10.3@53.721,79.502 52.07,79.502 51.816,79.756 v1(51.816,80.137) 51.834,80.155 51.834,80.409 52.189,80.764 53.713,80.764 U10.2@53.721,80.772 ; U9.3@53.721,85.852 v1(53.721,86.487) U9.2@53.721,87.122
  Bottom Layer w0.508: v1(38.608,35.306) 38.608,44.323 v1(38.354,44.577) 40.767,46.99 v1(40.767,55.372) ; v1(51.816,80.137) 51.816,84.582 v1(53.721,86.487)
  other v1: 18.669,12.573 31.242,12.7 32.258,12.7 33.274,12.7 34.417,12.7 19.558,13.335 30.48,13.335 35.179,13.335 18.669,13.843 35.687,13.97 19.558,14.224 30.48,14.351 18.415,15.113 19.558,15.113 16.002,25.4 16.764,25.4 17.399,25.4 16.002,26.289 16.764,26.289 17.399,26.289 16.002,27.178 16.764,27.178 17.399,27.178 10.033,28.448 11.049,28.702 30.353,49.911 30.353,50.546 28.194,62.484 28.194,62.992 37.846,97.536
5VON: R11.2 U2.7 U6.8 | length 45.1
  Top Layer w0.203: U6.8@36.957,78.867 35.052,78.867 34.036,77.851 34.036,68.58 36.757,65.859 36.757,65.837 36.965,65.629 36.987,65.629 40.275,62.341 R11.2@45.466,62.341 45.466,63.754 45.847,64.135 48.768,64.135 49.403,63.5 49.403,59.436 48.514,58.547 46.736,58.547 46.101,57.912 46.101,55.753 45.339,54.991 U2.7@43.841,54.991
15V: C17.1 C18.1 C49.1 C50.1 C59.2 C60.2 D22.2 R4.2 R35.1 R55.2 R68.1 R74.2 U4.6 U15.1 U16.8 | length 32.6
  Top Layer w0.203: U15.1@49.589,46.101 50.477,46.101 50.8,46.424 C60.2@50.8,48.26 ; R55.2@69.469,76.2 73.533,80.264 R68.1@74.295,80.264
  Top Layer w0.508: C50.1@50.419,51.435 50.419,48.641 C60.2@50.8,48.26 ; U4.6@54.991,31.877 57.023,33.909 C17.1@57.023,35.179 57.023,37.608 ; C18.1@56.023,38.608 57.023,37.608 ; C49.1@60.198,57.912 C59.2@62.595,57.912 62.595,59.833 U16.8@62.484,59.944 ; R74.2@63.246,39.878 60.976,37.608 57.023,37.608
-15V: C19.1 C20.2 C61.1 C63.2 R55.1 R74.1 U2.3 U4.4 U16.4 | length 27.7
  Top Layer w0.508: U4.4@49.911,31.877 47.465,34.323 C20.2@47.465,35.306 47.465,37.575 C19.1@48.498,38.608 48.498,39.989 50.165,41.656 58.928,41.656 R74.1@60.706,39.878 ; U16.4@67.284,63.754 67.284,65.447 C63.2@67.072,65.659 C61.1@69.596,65.659
A1: R14.2 U6.15 | length 20
  Top Layer w0.203: R14.2@20.685,92.837 22.022,91.5 22.022,86.294 23.556,84.76 23.571,84.76 24.562,83.769 24.562,78.308 26.543,76.327 U6.15@27.557,76.327
A2: R15.2 U6.14 | length 15.6
  Top Layer w0.203: R15.2@23.225,89.916 22.479,89.17 22.479,86.483 23.745,85.217 24.026,85.217 25.019,84.224 25.019,78.994 26.416,77.597 U6.14@27.557,77.597
A3: R16.2 U6.13 | length 10.4
  Top Layer w0.203: R16.2@24.241,87.249 25.476,86.014 25.476,79.807 26.416,78.867 U6.13@27.557,78.867
A4: R17.2 U6.12 | length 5.8
  Top Layer w0.203: R17.2@26.543,84.455 26.543,84.305 25.933,83.695 25.933,80.747 26.543,80.137 U6.12@27.557,80.137
AIN8: R54.1 U14.14 | length 6.3
  Top Layer w0.203: v1(23.368,55.372) 23.757,55.761 25.334,55.761 U14.14@25.338,55.765
  Top Layer w0.508: R54.1@20.193,54.721 v1(20.193,55.626)
  Bottom Layer w0.203: v1(20.193,55.626) 23.114,55.626 v1(23.368,55.372)
AIN11: C58.1 R47.1 U14.17 | length 32.6
  Top Layer w0.203: C58.1@18.145,33.909 18.145,32.909 18.466,32.588 21.147,32.588 21.387,32.828 21.387,39.294 22.149,40.056 22.149,45.413 24.511,47.775 24.511,53.34 24.957,53.786 26.027,53.786 26.063,53.822 U14.17@26.063,54.04
  Top Layer w0.508: R47.1@15.367,36.449 16.51,36.449 16.891,36.068 16.891,35.163 C58.1@18.145,33.909
C\S\: U6.16 U14.32 | length 31.9
  Top Layer w0.203: U6.16@27.557,75.057 26.162,75.057 24.816,73.711 24.816,68.529 26.416,66.929 31.623,66.929 32.491,66.061 32.491,65.045 36.068,61.468 36.068,58.835 35.498,58.265 U14.32@30.288,58.265
CHN1_N: C44.2 C45.1 R30.1 U14.4 | length 41
  Top Layer w0.203: C44.2@15.24,85.979 16.217,85.002 22.059,85.002 22.936,84.125 22.936,81.458 24.003,80.391 24.003,66.421 26.416,64.008 26.416,61.562 28.058,59.919 28.058,58.994 U14.4@28.063,58.99
  Top Layer w0.508: C44.2@15.24,85.979 R30.1@15.24,88.519 C45.1@18.018,88.519
CHN1_P: C43.1 C44.1 R29.1 U14.5 | length 41.4
  Top Layer w0.203: C43.1@15.256,83.439 16.362,84.545 21.87,84.545 22.479,83.936 22.479,81.269 23.546,80.202 23.546,66.232 25.959,63.819 25.959,61.372 27.558,59.773 27.558,58.994 U14.5@27.563,58.99
  Top Layer w0.508: C44.1@13.192,85.979 13.192,84.979 13.462,84.709 14.224,84.709 15.256,83.677 C43.1@15.256,83.439 15.24,83.423 R29.1@15.24,80.899
CHN2_N: C41.2 C42.1 R28.1 U14.6 | length 35
  Top Layer w0.203: 18.018,82.169 19.967,82.169 20.932,82.169 23.038,80.063 23.038,66.093 25.425,63.706 25.425,61.26 27.015,59.67 27.015,59.523 27.059,59.48 27.059,58.994 U14.6@27.063,58.99
  Top Layer w0.508: R28.1@15.256,78.359 17.796,80.899 C41.2@18.018,80.899 18.018,82.169 C42.1@18.018,83.439
CHN2_P: C40.1 C41.1 R27.1 U14.7 | length 34.4
  Top Layer w0.203: C41.1@20.066,80.899 20.066,81.049 20.565,81.548 20.683,81.548 20.908,81.548 22.581,79.874 22.581,65.904 24.968,63.517 24.968,61.071 26.558,59.48 26.558,58.994 U14.7@26.563,58.99
  Top Layer w0.508: R27.1@15.256,75.819 15.256,75.962 16.383,77.089 17.018,77.089 18.018,78.089 C40.1@18.018,78.359 18.018,79.359 18.288,79.629 19.685,79.629 20.066,80.01 C41.1@20.066,80.899
CHN3_N: C38.2 C39.1 R26.1 U14.8 | length 26
  Top Layer w0.203: 18.018,74.557 21.074,74.557 22.098,73.533 22.098,65.741 24.511,63.328 24.511,60.827 26.063,59.275 U14.8@26.063,58.99
  Top Layer w0.508: R26.1@15.24,73.279 C38.2@18.034,73.279 18.018,73.295 18.018,74.557 C39.1@18.018,75.819